# EAGLE board LinCorrector4.1 (EAGLE 7.4.0)
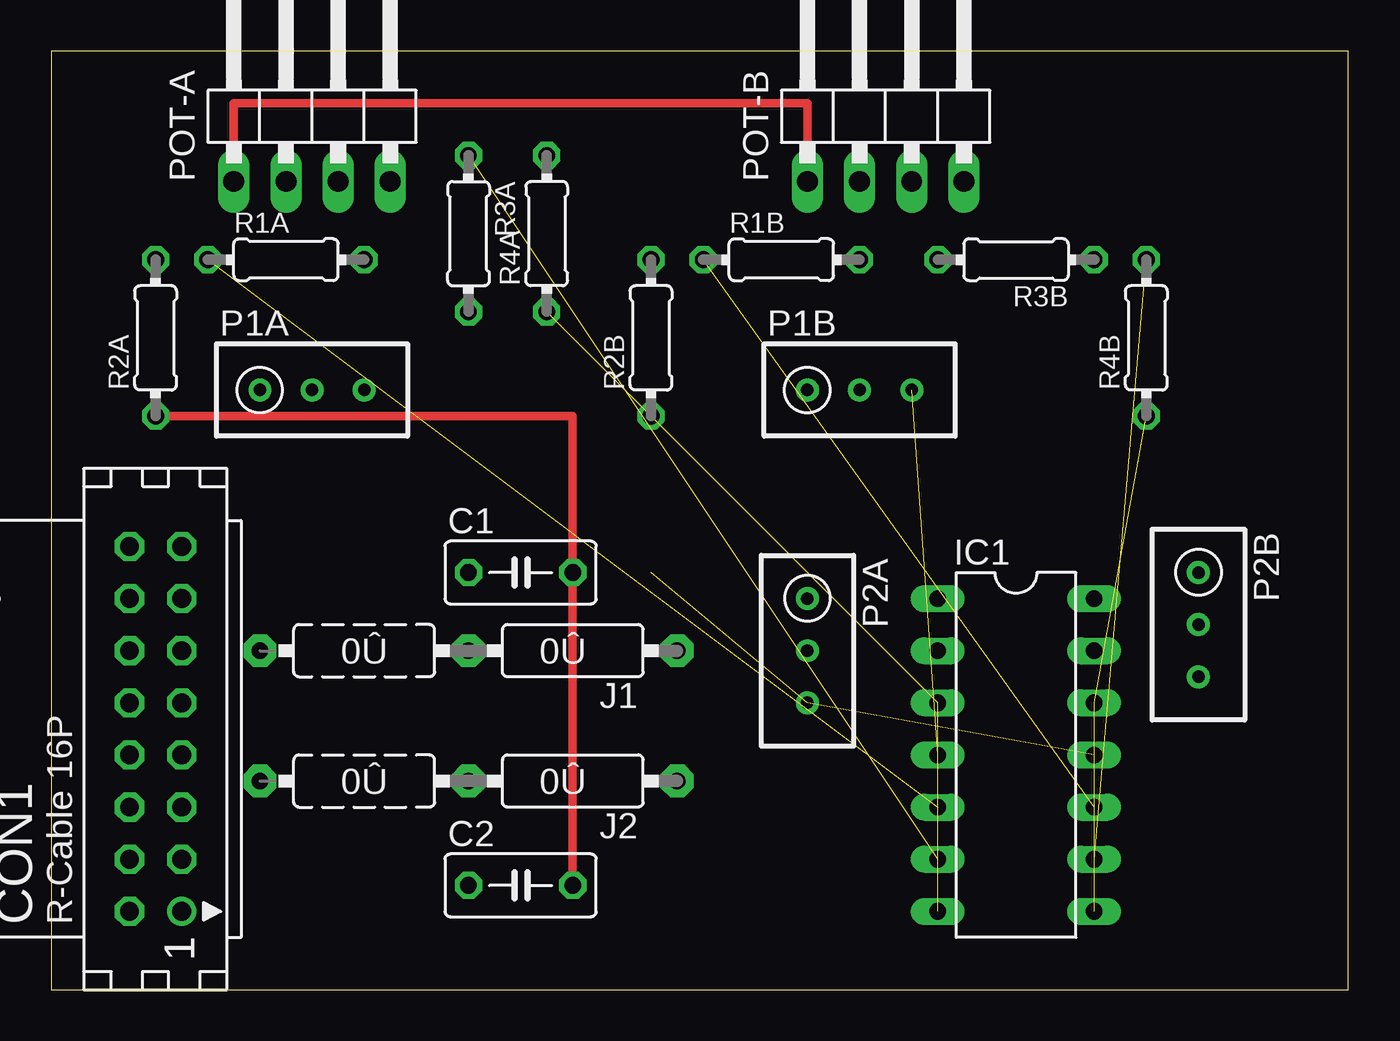
[diagram p0: board, top side]
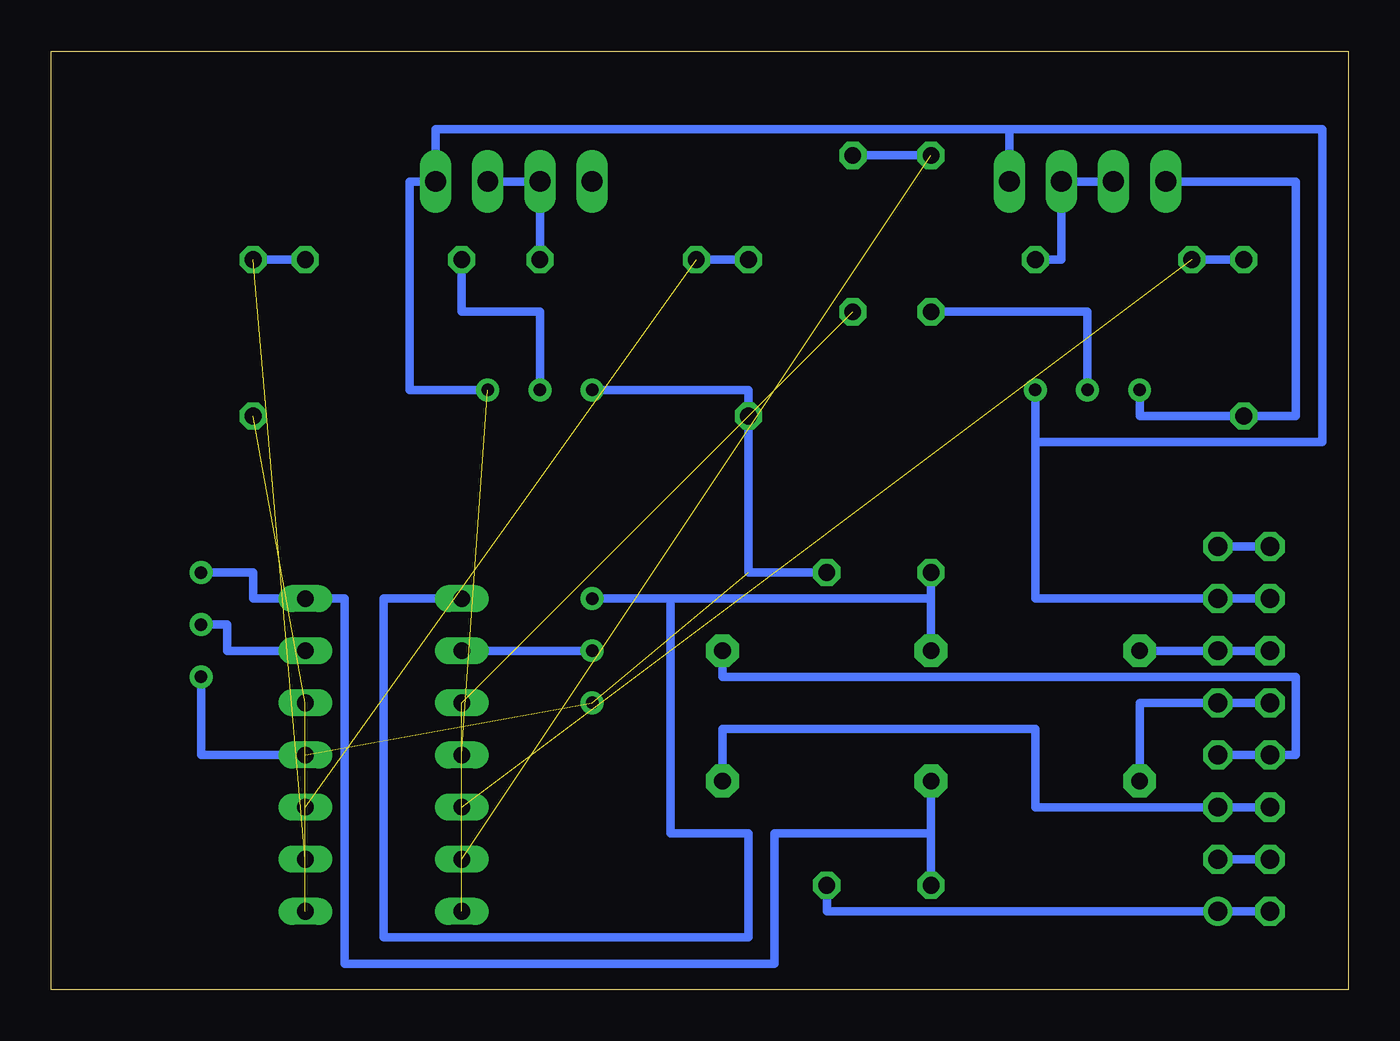
[diagram p1: board, bottom side, seen from below]

Size 63.17 x 45.71 mm. Coordinates in mm from the lower left corner, seen from the top.
Outline: 0,0 63.17,0 63.17,45.71 0,45.71 0,0
Copper layers (1*16): Top 0.035mm / dielectric 1.5mm / Bottom 0.035mm
Design rules "default": minimum track width 10mil, minimum drill 24mil, track to track 8mil, track to pad 8mil, pad to pad 8mil, via to via 8mil, smd to smd 8mil, copper to edge 40mil, drill to drill 8mil, minimum pad ring 10mil, minimum via ring 8mil, stop-mask expansion 4mil, vias tented up to drill 0mil, thermal gap 10mil
Net classes: 0 default: width 0.381 mm, drill 0.508 mm, clearance 0.381 mm

## Footprints (pad centres in the part's own frame; a part is rotated, then mirrored left to right if it is on the bottom)
C050-030X075 = drill 0.813 octagon: 1 -2.54,0; 2 2.54,0
CON16 = drill 0.914: 1 -8.89,-1.27 | drill 0.914 octagon: 2 -8.89,1.27; 3 -6.35,-1.27; 4 -6.35,1.27; 5 -3.81,-1.27; 6 -3.81,1.27; 7 -1.27,-1.27; 8 -1.27,1.27; 9 1.27,-1.27; 10 1.27,1.27; 11 3.81,-1.27; 12 3.81,1.27; 13 6.35,-1.27; 14 6.35,1.27; 15 8.89,-1.27; 16 8.89,1.27
DIL14 = drill 0.813 long: 1 -7.62,-3.81; 2 -5.08,-3.81; 3 -2.54,-3.81; 4 0,-3.81; 5 2.54,-3.81; 6 5.08,-3.81; 7 7.62,-3.81; 8 7.62,3.81; 9 5.08,3.81; 10 2.54,3.81; 11 0,3.81; 12 -2.54,3.81; 13 -5.08,3.81; 14 -7.62,3.81
0R2/10 = drill 0.813 pad 1.6 octagon: 1 -5.08,0; 2 5.08,0; 3 15.24,0
RTRIM3296W = drill 0.61: 1 0,-2.54; 2 0,0; 3 0,2.54
1X04/90 = drill 1.016 long: 1 -3.81,-3.81; 2 -1.27,-3.81; 3 1.27,-3.81; 4 3.81,-3.81
0204/7 = drill 0.813 octagon: 1 -3.81,0; 2 3.81,0

## Placement (x,y rotation side)
C1  [C050-030X075]  22.86,20.32 0 top
C2  [C050-030X075]  22.86,5.08 0 top
CON1  [CON16]  5.08,12.7 90 top
IC1  MCP604P  [DIL14]  46.99,11.43 270 top
J1  0  [0R2/10]  25.4,16.51 180 top
J2  0  [0R2/10]  25.4,10.16 180 top
P1A  500k  [RTRIM3296W]  12.7,29.21 270 top
P1B  500k  [RTRIM3296W]  39.37,29.21 270 top
P2A  500k  [RTRIM3296W]  36.83,16.51 180 top
P2B  500k  [RTRIM3296W]  55.88,17.78 180 top
POT-A  [1X04/90]  12.7,43.18 0 top
POT-B  [1X04/90]  40.64,43.18 0 top
R1A  10k  [0204/7]  11.43,35.56 0 top
R1B  10k  [0204/7]  35.56,35.56 0 top
R2A  10k  [0204/7]  5.08,31.75 90 top
R2B  10k  [0204/7]  29.21,31.75 90 top
R3A  10k  [0204/7]  20.32,36.83 270 top
R3B  10k  [0204/7]  46.99,35.56 180 top
R4A  10k  [0204/7]  24.13,36.83 90 top
R4B  10k  [0204/7]  53.34,31.75 90 top

## Library data of the parts
C1 C2 = adafruit
CON1 = con-harting; OC_FARNELL: unknown; OC_NEWARK: unknown
IC1 = linear
J1 J2 = jumper
P1A P1B P2A P2B = resistor
POT-A POT-B = pinhead
R1A R1B R2A R2B R3A R3B R4A R4B = rcl

## Nets
GND: C1.2 C2.2 CON1.1 CON1.2 IC1.11 P1A.1 P1B.1 P2A.3 P2B.3 POT-A.1 POT-B.1 R2A.1 R2B.1
N$1: IC1.5 R1A.1 R2A.2
N$2: POT-A.2 POT-A.3 R1A.2
N$3: P1A.2 R3A.2
N$4: IC1.6 R3A.1 R4A.2
N$5: IC1.3 IC1.7 R4A.1
N$6: IC1.10 R1B.1 R2B.2
N$7: IC1.2 P2A.2
N$8: C1.1 IC1.1 J1.2 P2A.1
N$9: P1B.2 R3B.2
N$10: IC1.9 R3B.1 R4B.2
N$11: IC1.8 IC1.12 R4B.1
N$12: IC1.13 P2B.2
N$13: C2.1 IC1.14 J2.2 P2B.1
N$14: POT-B.2 POT-B.3 R1B.2
N$15: CON1.11 CON1.12 J1.3
N$16: CON1.9 CON1.10 J2.3
N$17: CON1.15 CON1.16
N$18: CON1.3 CON1.4
N$32: CON1.7 CON1.8 J1.1
N$36: CON1.5 CON1.6 J2.1
VCC: CON1.13 CON1.14 IC1.4 P1A.3 P1B.3 POT-A.4 POT-B.4

## Tracks (layer width: path | path; a pad name or v marks a point on that pad's centre or on a via)
GND  (2 unrouted)
  Top 0.406: C2.2 C1.2 25.4,27.94 R2A.1 | POT-B.1 36.83,43.18 8.89,43.18 POT-A.1
  Bottom 0.406: P1A.1 10.16,27.94 R2A.1 2.54,27.94 2.54,39.37 POT-A.1 | CON1.2 CON1.1 25.4,3.81 C2.2 | P2B.3 55.88,11.43 IC1.11 | C1.2 29.21,20.32 R2B.1 29.21,29.21 P1B.1
N$1  (1 unrouted)
  Bottom 0.406: R1A.1 R2A.2
N$2
  Bottom 0.406: POT-A.2 POT-A.3 13.97,35.56 R1A.2
N$3
  Bottom 0.406: R3A.2 12.7,33.02 P1A.2
N$4  (1 unrouted)
  Bottom 0.406: R3A.1 R4A.2
N$5  (2 unrouted)
N$6  (1 unrouted)
  Bottom 0.406: R2B.2 R1B.1
N$7
  Bottom 0.406: P2A.2 IC1.2
N$8
  Bottom 0.406: J1.2 20.32,19.05 | C1.1 20.32,19.05 | 20.32,19.05 33.02,19.05 | 33.02,19.05 33.02,7.62 29.21,7.62 29.21,2.54 46.99,2.54 46.99,19.05 IC1.1 | P2A.1 33.02,19.05
N$9
  Bottom 0.406: P1B.2 39.37,33.02 43.18,33.02 R3B.2
N$10  (1 unrouted)
  Bottom 0.406: R3B.1 R4B.2
N$11  (2 unrouted)
N$12
  Bottom 0.406: IC1.13 54.61,16.51 54.61,17.78 P2B.2
N$13
  Bottom 0.406: C2.1 20.32,7.62 | J2.2 20.32,7.62 | 20.32,7.62 27.94,7.62 27.94,1.27 48.9,1.27 48.9,19.05 IC1.14 53.34,19.05 53.34,20.32 P2B.1
N$14
  Bottom 0.406: R1B.2 POT-B.2 POT-B.3
N$15
  Bottom 0.406: CON1.12 CON1.11 J1.3
N$16
  Bottom 0.406: CON1.10 CON1.9 10.16,13.97 J2.3
N$17
  Bottom 0.406: CON1.16 CON1.15
N$18
  Bottom 0.406: CON1.4 CON1.3
N$32
  Bottom 0.406: CON1.7 CON1.8 2.54,11.43 2.54,15.24 30.48,15.24 J1.1
N$36
  Bottom 0.406: CON1.6 CON1.5 15.24,8.89 15.24,12.7 30.48,12.7 J2.1
VCC  (1 unrouted)
  Bottom 0.406: CON1.14 CON1.13 15.24,19.05 15.24,26.67 | 15.24,26.67 P1A.3 | POT-A.4 16.51,41.91 | 16.51,41.91 1.27,41.91 1.27,26.67 15.24,26.67 | 16.51,41.91 44.45,41.91 POT-B.4 45.72,39.37 45.72,29.21 P1B.3